# Altium PCB LDM_PCB.PcbDoc
Units mm, origin at the board's own origin, x right, y up, seen from the top; angles counter-clockwise.
Board outline 64 x 24 mm, 2 copper layers (Top Layer, Bottom Layer), stack 1.571 mm thick; 49 components, 27 nets, 118 pads, 10 vias.
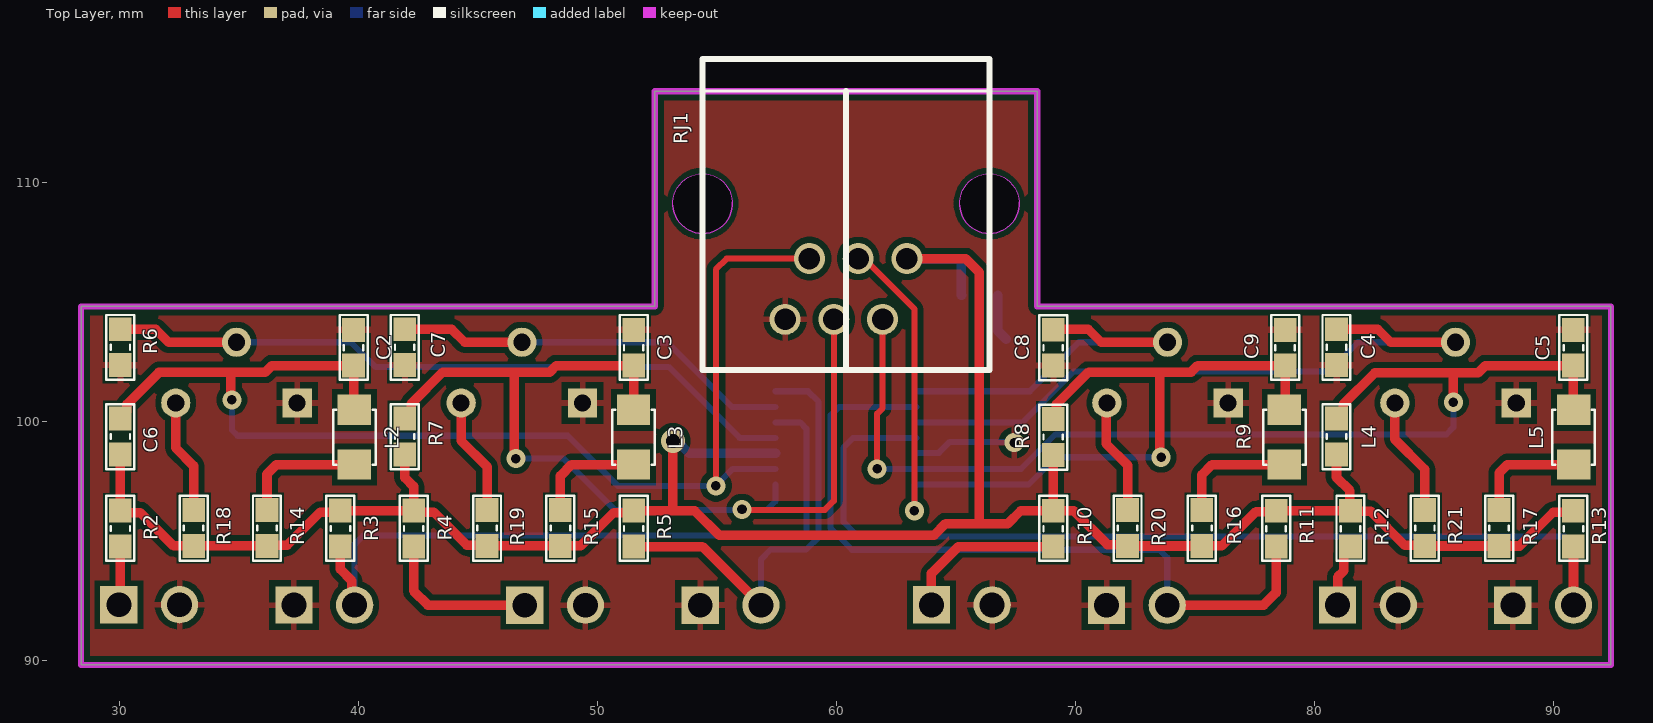
[diagram p0: Top Layer view]
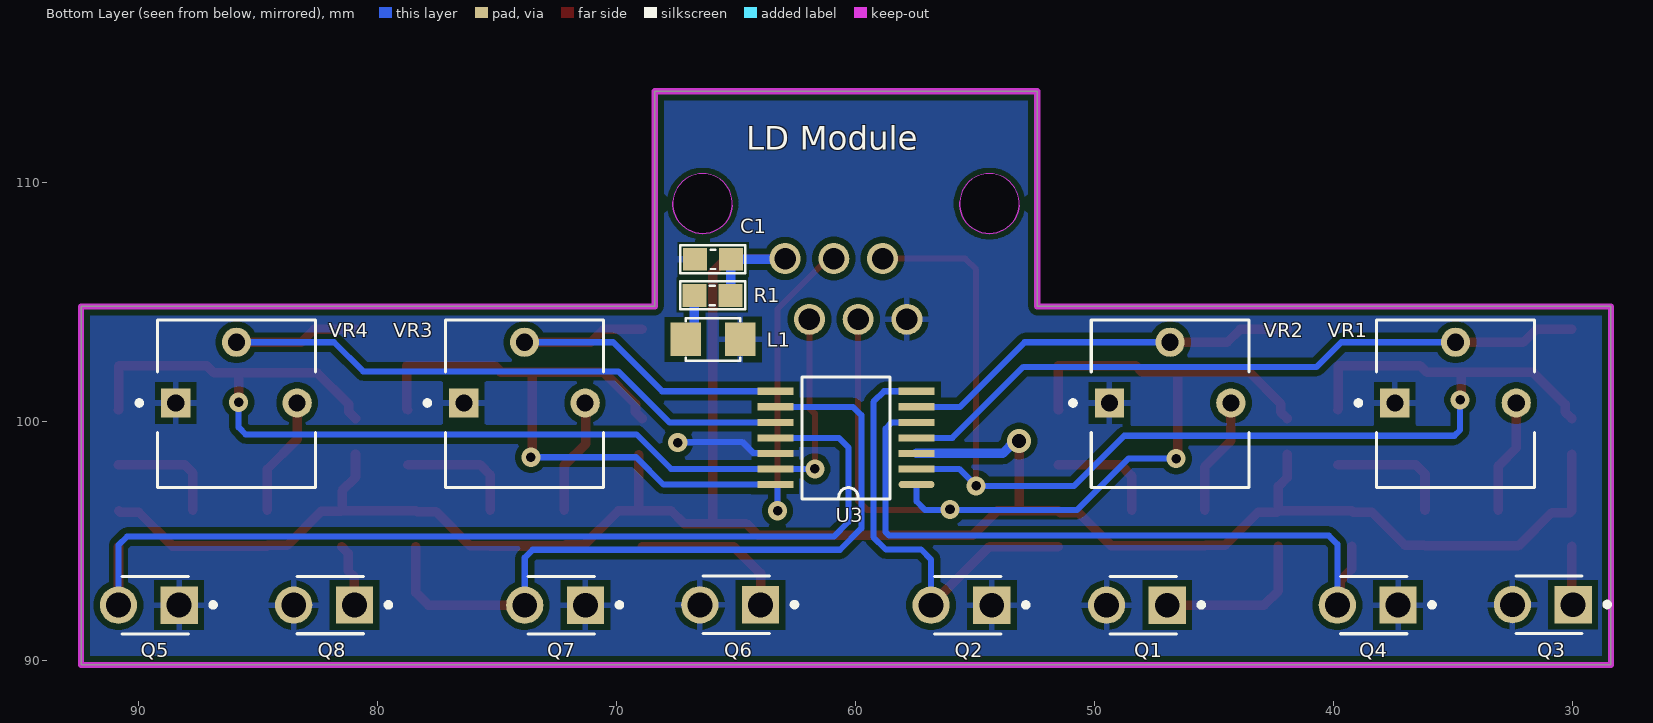
[diagram p1: Bottom Layer view, seen from below]
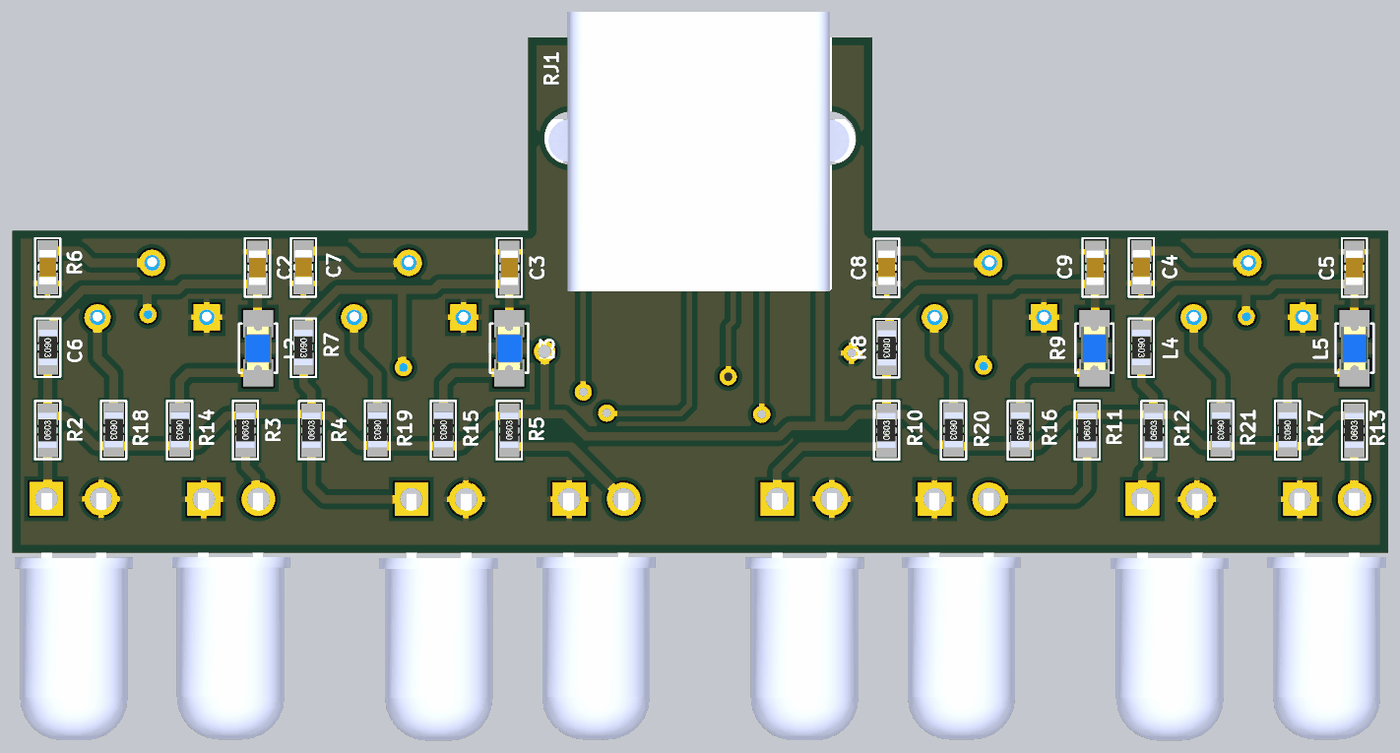
[diagram p2: 3D render of the assembled board from above, using the file's embedded part models]
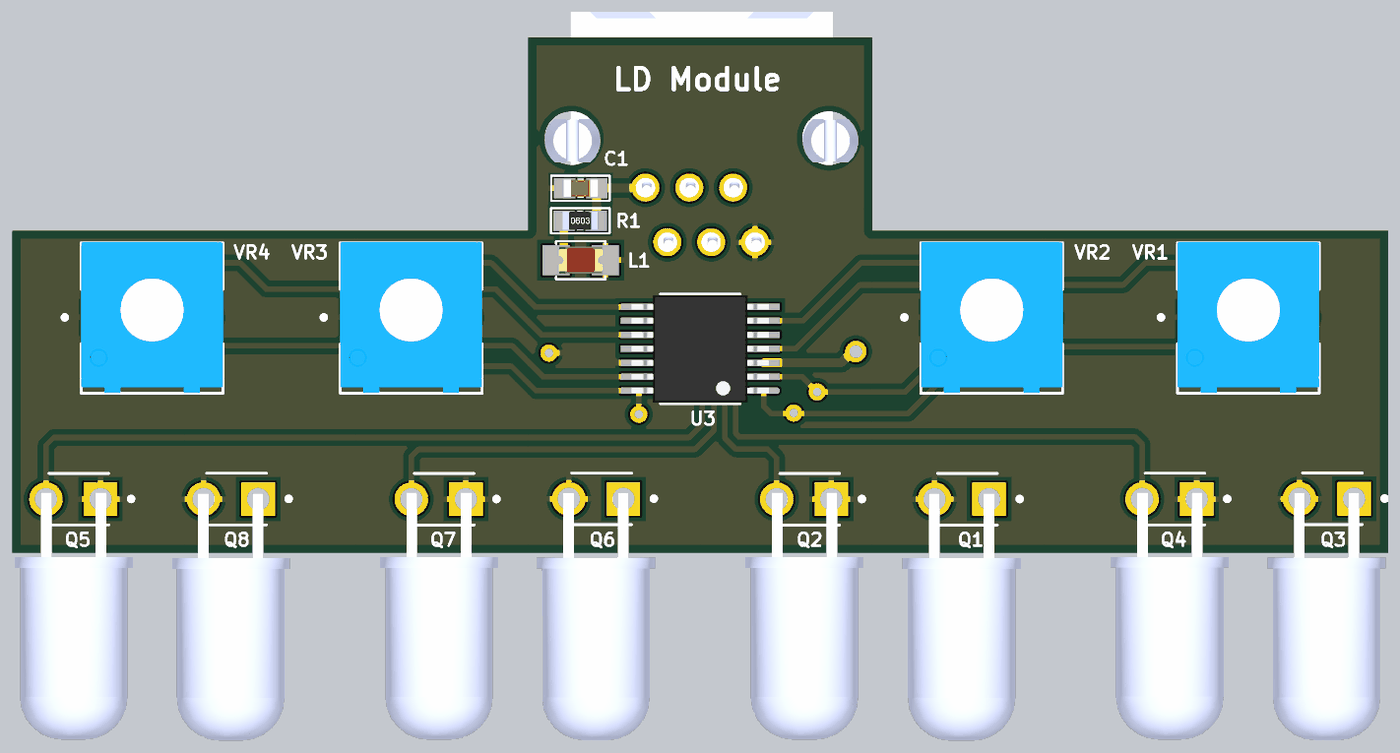
[diagram p3: 3D render of the assembled board from below, using the file's embedded part models]

## Layer stack, top to bottom
Top Solder: solder mask 0.0102, Solder Resist, Dk 3.5
Top Layer: signal copper 0.0356
Dielectric 1: dielectric 1.5, FR-4, Dk 4.8
Bottom Layer: signal copper 0.0356
Bottom Solder: solder mask 0.0102, Solder Resist, Dk 3.5

## Board outline
28.4,89.8 28.4,104.8 52.4,104.8 52.4,113.8 68.4,113.8 68.4,104.8 92.4,104.8 92.4,89.8

## Design rules (kind name [scope] priority, off if disabled: settings)
Clearance [All] p1: gap=0.254 ignorepadtopadclearanceinfootprint=FALSE except(0: Arc-Hole Track-Hole SMDPad-Hole THPad-Hole Via-Hole Fill-Hole Poly-Hole Region-Hole Text-Hole; 0.178: Arc-Text Track-Text SMDPad-Text THPad-Text Via-Text Fill-Text Poly-Text Region-Text Text-Text)
PolygonConnect [All] p1: connectstyle=Relief reliefconductorwidth=0.254 reliefentries=4 polygonreliefangle="90 Angle" airgapwidth=0.254
RoomDefinition LDM_SCH [InComponentClass('LDM_SCH')] p1: confinementstyle=ConfineIn formatcopy=TRUE lockcomponents=FALSE outline 178.943,26.924 408.813,26.924 408.813,48.133 178.943,48.133
RoutingVias [All] p1: holewidth=0.4 width=0.8 viastyle="Through Hole" minholewidth=0.3 minwidth=0.6 maxholewidth=0.5 maxwidth=1
SolderMaskExpansion [All] p1: expansion=0.102 istentingtop=FALSE
Width [All] p1: maxlimit=0.6 minlimit=0.254 preferedwidth=0.4
30 further rules are at their usual default settings.

## Components (designator, comment, footprint, x,y, rotation, side; value= is the part's Value field where it differs from the comment)
C1 "104" "tu 0603" 65.96,106.77 r0 bottom
C2 "100nF" "tu 0603" 39.8,103.07 r90 top
C3 "100nF" "tu 0603" 51.52,103.07 r90 top
C4 "100nF" "tu 0603" 78.77,103.07 r90 top
C5 "100nF" "tu 0603" 90.83,103.07 r90 top
C6 "100nF" "tu 0603" 30.04,103.095 r270 top
C7 "100nF" "tu 0603" 41.94,103.095 r270 top
C8 "100nF" "tu 0603" 69.07,103.075 r270 top
C9 "100nF" "tu 0603" 80.92,103.095 r270 top
L1 "LED 0805" LED-0805-Red 67.106,103.42 r180 bottom
L2 "LED 0805" LED-0805-Blue 39.83,98.184 r90 top
L3 "LED 0805" LED-0805-Blue 51.51,98.184 r90 top
L4 "LED 0805" LED-0805-Blue 78.74,98.184 r90 top
L5 "LED 0805" LED-0805-Blue 90.84,98.184 r90 top
Q1 "IR333-A" IR333-A 48.23,92.3 r0 bottom
Q2 "PD333-3B" PD333-3B 55.57,92.3 r0 bottom
Q3 "IR333-A" IR333-A 31.25,92.32 r0 bottom
Q4 "PD333-3B" PD333-3B 38.575,92.305 r0 bottom
Q5 "PD333-3B" PD333-3B 89.567,92.303 r0 bottom
Q6 "IR333-A" IR333-A 65.245,92.315 r0 bottom
Q7 "PD333-3B" PD333-3B 72.57,92.3 r0 bottom
Q8 "IR333-A" IR333-A 82.235,92.305 r0 bottom
R1 "1k" "tro smd 0603" 65.99,105.26 r180 bottom
R2 "330R" "tro smd 0603" 30.04,95.505 r90 top
R3 "10k" "tro smd 0603" 39.246,95.505 r90 top
R4 "330R" "tro smd 0603" 42.314,95.505 r90 top
R5 "10k" "tro smd 0603" 51.52,95.505 r90 top
R6 "10k" "tro smd 0603" 30.04,99.36 r270 top
R7 "10k" "tro smd 0603" 41.94,99.36 r270 top
R8 "10k" "tro smd 0603" 69.07,99.34 r270 top
R9 "10k" "tro smd 0603" 80.92,99.36 r270 top
R10 "330R" "tro smd 0603" 69.07,95.5 r90 top
R11 "10k" "tro smd 0603" 78.396,95.5 r90 top
R12 "330R" "tro smd 0603" 81.504,95.5 r90 top
R13 "10k" "tro smd 0603" 90.83,95.5 r90 top
R14 "1k" "tro smd 0603" 36.177,95.53 r270 top
R15 "1k" "tro smd 0603" 48.451,95.53 r270 top
R16 "1k" "tro smd 0603" 75.287,95.525 r270 top
R17 "1k" "tro smd 0603" 87.721,95.525 r270 top
R18 "1k" "tro smd 0603" 33.109,95.53 r270 top
R19 "1k" "tro smd 0603" 45.383,95.53 r270 top
R20 "1k" "tro smd 0603" 72.179,95.525 r270 top
R21 "1k" "tro smd 0603" 84.613,95.525 r270 top
RJ1 "DS1133-S60BPX" RJ11-TH_DS1133-S60BPX 60.399,105.53 r270 top
U3 "LM339DR" TSSOP14_25.6_296_15X55_SMD 60.4,99.3 r0 bottom
VR1 "10k" TRIM_3362P-1-102 34.9,100.76 r180 bottom
VR2 "10k" TRIM_3362P-1-102 46.84,100.76 r180 bottom
VR3 "10k" TRIM_3362P-1-102 73.85,100.76 r180 bottom
VR4 "10k" TRIM_3362P-1-102 85.9,100.76 r180 bottom

## Footprints (in the part's own frame and the unit in brackets; to place one, negate y for a bottom-side part, rotate by r counter-clockwise, add the part's x,y. Pads: shape width x height; smd on the part's side, far side on the other; paste and mask are expansions set on the pad)
IR333-A [mm]
  rect 1.56x1.56 hole 1.04: C(-1.27,0)
  round 1.56 hole 1.04: E(1.27,0)
  silkscreen extent -2.79,-1.2 1.13,1.2, body extent -2.74,-0.26 2.76,11.24, height 3
LED-0805-Blue [mil]
  rect 50x55 smd: 1(0,0) 2(90,0)
  silkscreen extent 0,-35 90,35, body extent 5,-25 85,25, height 43
LED-0805-Red [mil]
  rect 50x55 smd: 1(0,0) 2(90,0)
  silkscreen extent 0,-35 90,35, body extent 5,-25 85,25, height 43
PD333-3B [mm]
  rect 1.56x1.56 hole 1.04: C(-1.27,0)
  round 1.56 hole 1.04: E(1.27,0)
  silkscreen extent -2.79,-1.2 1.13,1.2, body extent -2.77,-0.31 2.73,11.19, height 3
RJ11-TH_DS1133-S60BPX [mil]
  round 51.2 hole 35.4: 1(50,-100.3) 2(-50,-60.2) 3(50,-20) 4(-50,20.1) 5(50,60.3) 6(-50,100.4)
  Keep-Out Layer board cut-out: -91.3,236.3 -91.7,230.1 -92.9,224 -94.8,218.2 -97.4,212.6 -100.7,207.3 -104.7,202.6 -109.2,198.3 -114.2,194.7 -119.6,191.7 -125.3,189.5 -131.3,187.9 -137.5,187.2 -143.6,187.2 -149.8,187.9 -155.8,189.5 -161.5,191.7 -166.9,194.7 -171.9,198.3 -176.4,202.6 -180.4,207.3 -183.7,212.6 -186.3,218.2 -188.2,224 -189.4,230.1 -189.8,236.3 -189.4,242.4 -188.2,248.5 -186.3,254.4 -183.7,260 -180.4,265.2 -176.4,270 -171.9,274.2 -166.9,277.8 -161.5,280.8 -155.8,283.1 -149.8,284.6 -143.6,285.4 -137.5,285.4 -131.3,284.6 -125.3,283.1 -119.6,280.8 -114.2,277.8 -109.2,274.2 -104.7,270 -100.7,265.2 -97.4,260 -94.8,254.4 -92.9,248.5 -91.7,242.4 -91.3,236.3
  Keep-Out Layer board cut-out: -91.3,-236.2 -91.7,-242.3 -92.9,-248.4 -94.8,-254.3 -97.4,-259.9 -100.7,-265.1 -104.7,-269.9 -109.2,-274.1 -114.2,-277.7 -119.6,-280.7 -125.3,-283 -131.3,-284.5 -137.5,-285.3 -143.6,-285.3 -149.8,-284.5 -155.8,-283 -161.5,-280.7 -166.9,-277.7 -171.9,-274.1 -176.4,-269.9 -180.4,-265.1 -183.7,-259.9 -186.3,-254.3 -188.2,-248.4 -189.4,-242.3 -189.8,-236.2 -189.4,-230 -188.2,-223.9 -186.3,-218.1 -183.7,-212.5 -180.4,-207.2 -176.4,-202.5 -171.9,-198.3 -166.9,-194.6 -161.5,-191.6 -155.8,-189.4 -149.8,-187.8 -143.6,-187.1 -137.5,-187.1 -131.3,-187.8 -125.3,-189.4 -119.6,-191.6 -114.2,-194.6 -109.2,-198.3 -104.7,-202.5 -100.7,-207.2 -97.4,-212.5 -94.8,-218.1 -92.9,-223.9 -91.7,-230 -91.3,-236.2
  Keep-Out Layer region: -91.3,236.3 -91.7,230.1 -92.9,224 -94.8,218.2 -97.4,212.6 -100.7,207.3 -104.7,202.6 -109.2,198.3 -114.2,194.7 -119.6,191.7 -125.3,189.5 -131.3,187.9 -137.5,187.2 -143.6,187.2 -149.8,187.9 -155.8,189.5 -161.5,191.7 -166.9,194.7 -171.9,198.3 -176.4,202.6 -180.4,207.3 -183.7,212.6 -186.3,218.2 -188.2,224 -189.4,230.1 -189.8,236.3 -189.4,242.4 -188.2,248.5 -186.3,254.4 -183.7,260 -180.4,265.2 -176.4,270 -171.9,274.2 -166.9,277.8 -161.5,280.8 -155.8,283.1 -149.8,284.6 -143.6,285.4 -137.5,285.4 -131.3,284.6 -125.3,283.1 -119.6,280.8 -114.2,277.8 -109.2,274.2 -104.7,270 -100.7,265.2 -97.4,260 -94.8,254.4 -92.9,248.5 -91.7,242.4 -91.3,236.3
  Keep-Out Layer region: -91.3,236.3 -91.7,230.1 -92.9,224 -94.8,218.2 -97.4,212.6 -100.7,207.3 -104.7,202.6 -109.2,198.3 -114.2,194.7 -119.6,191.7 -125.3,189.5 -131.3,187.9 -137.5,187.2 -143.6,187.2 -149.8,187.9 -155.8,189.5 -161.5,191.7 -166.9,194.7 -171.9,198.3 -176.4,202.6 -180.4,207.3 -183.7,212.6 -186.3,218.2 -188.2,224 -189.4,230.1 -189.8,236.3 -189.4,242.4 -188.2,248.5 -186.3,254.4 -183.7,260 -180.4,265.2 -176.4,270 -171.9,274.2 -166.9,277.8 -161.5,280.8 -155.8,283.1 -149.8,284.6 -143.6,285.4 -137.5,285.4 -131.3,284.6 -125.3,283.1 -119.6,280.8 -114.2,277.8 -109.2,274.2 -104.7,270 -100.7,265.2 -97.4,260 -94.8,254.4 -92.9,248.5 -91.7,242.4 -91.3,236.3
  Keep-Out Layer region: -91.3,-236.2 -91.7,-242.3 -92.9,-248.4 -94.8,-254.3 -97.4,-259.9 -100.7,-265.1 -104.7,-269.9 -109.2,-274.1 -114.2,-277.7 -119.6,-280.7 -125.3,-283 -131.3,-284.5 -137.5,-285.3 -143.6,-285.3 -149.8,-284.5 -155.8,-283 -161.5,-280.7 -166.9,-277.7 -171.9,-274.1 -176.4,-269.9 -180.4,-265.1 -183.7,-259.9 -186.3,-254.3 -188.2,-248.4 -189.4,-242.3 -189.8,-236.2 -189.4,-230 -188.2,-223.9 -186.3,-218.1 -183.7,-212.5 -180.4,-207.2 -176.4,-202.5 -171.9,-198.3 -166.9,-194.6 -161.5,-191.6 -155.8,-189.4 -149.8,-187.8 -143.6,-187.1 -137.5,-187.1 -131.3,-187.8 -125.3,-189.4 -119.6,-191.6 -114.2,-194.6 -109.2,-198.3 -104.7,-202.5 -100.7,-207.2 -97.4,-212.5 -94.8,-218.1 -92.9,-223.9 -91.7,-230 -91.3,-236.2
  Keep-Out Layer region: -91.3,-236.2 -91.7,-242.3 -92.9,-248.4 -94.8,-254.3 -97.4,-259.9 -100.7,-265.1 -104.7,-269.9 -109.2,-274.1 -114.2,-277.7 -119.6,-280.7 -125.3,-283 -131.3,-284.5 -137.5,-285.3 -143.6,-285.3 -149.8,-284.5 -155.8,-283 -161.5,-280.7 -166.9,-277.7 -171.9,-274.1 -176.4,-269.9 -180.4,-265.1 -183.7,-259.9 -186.3,-254.3 -188.2,-248.4 -189.4,-242.3 -189.8,-236.2 -189.4,-230 -188.2,-223.9 -186.3,-218.1 -183.7,-212.5 -180.4,-207.2 -176.4,-202.5 -171.9,-198.3 -166.9,-194.6 -161.5,-191.6 -155.8,-189.4 -149.8,-187.8 -143.6,-187.1 -137.5,-187.1 -131.3,-187.8 -125.3,-189.4 -119.6,-191.6 -114.2,-194.6 -109.2,-198.3 -104.7,-202.5 -100.7,-207.2 -97.4,-212.5 -94.8,-218.1 -92.9,-223.9 -91.7,-230 -91.3,-236.2
  Keep-Out Layer lines w0.1: -137.5,-285.3 -131.3,-284.5 -125.3,-283 -119.6,-280.7 -114.2,-277.7 -109.2,-274.1 -104.7,-269.9 -100.7,-265.1 -97.4,-259.9 -94.8,-254.3 -92.9,-248.4 -91.7,-242.3 -91.3,-236.2 -91.7,-230 -92.9,-223.9 -94.8,-218.1 -97.4,-212.5 -100.7,-207.2 -104.7,-202.5 -109.2,-198.3 -114.2,-194.6 -119.6,-191.6 -125.3,-189.4 -131.3,-187.8 -137.5,-187.1 -143.6,-187.1 -149.8,-187.8 -155.8,-189.4 -161.5,-191.6 -166.9,-194.6 -171.9,-198.3 -176.4,-202.5 -180.4,-207.2 -183.7,-212.5 -186.3,-218.1 -188.2,-223.9 -189.4,-230 -189.8,-236.2 -189.4,-242.3 -188.2,-248.4 -186.3,-254.3 -183.7,-259.9 -180.4,-265.1 -176.4,-269.9 -171.9,-274.1 -166.9,-277.7 -161.5,-280.7 -155.8,-283 -149.8,-284.5 -143.6,-285.3 -137.5,-285.3 ; -137.5,187.2 -131.3,187.9 -125.3,189.5 -119.6,191.7 -114.2,194.7 -109.2,198.3 -104.7,202.6 -100.7,207.3 -97.4,212.6 -94.8,218.2 -92.9,224 -91.7,230.1 -91.3,236.3 -91.7,242.4 -92.9,248.5 -94.8,254.4 -97.4,260 -100.7,265.2 -104.7,270 -109.2,274.2 -114.2,277.8 -119.6,280.8 -125.3,283.1 -131.3,284.6 -137.5,285.4 -143.6,285.4 -149.8,284.6 -155.8,283.1 -161.5,280.8 -166.9,277.8 -171.9,274.2 -176.4,270 -180.4,265.2 -183.7,260 -186.3,254.4 -188.2,248.5 -189.4,242.4 -189.8,236.3 -189.4,230.1 -188.2,224 -186.3,218.2 -183.7,212.6 -180.4,207.3 -176.4,202.6 -171.9,198.3 -166.9,194.7 -161.5,191.7 -155.8,189.5 -149.8,187.9 -143.6,187.2 -137.5,187.2
  silkscreen extent -379,-236 133,236, body extent -372,-289 140,285, height 575
TRIM_3362P-1-102 [mm]
  rect 1.222x1.222 / inner round 1.222 / far side rect 1.222x1.222 hole 0.714: 1(-2.54,0)
  round 1.222 hole 0.714: 2(0,2.54) 3(2.54,0)
  silkscreen extent -4.16,-3.53 3.3,3.47, body extent -3.3,-3.49 3.3,3.49, height 4.88
"tro smd 0603" [mm] "Chip Capacitor, 2-Leads, Body 1,60x0,80mm, IPC Medium Density"
  rect 1x0.95 smd mask+0.076: 1(-0.75,0) 2(0.75,0)
  silkscreen extent -1.35,-0.58 1.37,0.58, body extent -0.82,-0.42 0.82,0.43, height 0.44
TSSOP14_25.6_296_15X55_SMD [mm] "CASE: TSSOP"
  oval 1.5x0.3 smd: 1(-2.95,1.95)
  rect 1.5x0.3 smd: 2(-2.95,1.3) 3(-2.95,0.65) 4(-2.95,0) 5(-2.95,-0.65) 6(-2.95,-1.3) 7(-2.95,-1.95) 8(2.95,-1.95) 9(2.95,-1.3) 10(2.95,-0.65) 11(2.95,0) 12(2.95,0.65) 13(2.95,1.3) 14(2.95,1.95)
  silkscreen extent -1.85,-2.55 1.85,2.55, body extent -3.2,-2.5 3.2,2.5, height 1.2
"tu 0603" [mm] "Chip Capacitor, 2-Leads, Body 1,60x0,80mm, IPC Medium Density"
  rect 1x0.95 smd mask+0.076: 1(-0.75,0) 2(0.75,0)
  silkscreen extent -1.35,-0.58 1.37,0.58, body extent -0.8,-0.4 0.8,0.4, height 0.9

## Part data
C1 C2 C3 C4 C5 C6 C7 C8 C9: library part "Tu 0603 104 50V 10%", "Dán", Chung_Loai=Dán, Don_Vi=Con, Ma_Hang=MH004568, So_Chan=2, Ten_Linh_Kien="Tụ 0603 104-100nF 10% 50V"
L1: library part "LED 0805 Do", "Dán", Chung_Loai=Dán, Don_Vi=Con, Ma_Hang=MH000897, Ten_Linh_Kien="LED 0805 Màu Đỏ (Red)"
L2 L3 L4 L5: library part "LED 0805 Xanh Duong", "Dán", Chung_Loai=Dán, Don_Vi=Con, Ma_Hang=MH002327, Ten_Linh_Kien="LED 0805 Màu Xanh Dương (Blue)"
Q1 Q2 Q3 Q4 Q5 Q6 Q7 Q8: Package=None, Availability=Unavailable, MP=BPW16N, Price=None
R1 R6 R7 R8 R9 R14 R15 R16 R17: library part "Tro 0603 1% 1k", "Dán", Chung_Loai=Dán, Don_Vi=Con, Ma_Hang=MH006334, So_Chan=2, Ten_Linh_Kien="Trở 0603 1% 1k"
R2 R4 R10 R12: library part "Tro 0603 5% 330R", "Dán", Chung_Loai=Dán, Don_Vi=Con, Ma_Hang=MH006910, So_Chan=2, Ten_Linh_Kien="Trở 0603 5% 330R"
R3 R5 R11 R13 R18 R19 R20 R21: library part "Tro 0603 1% 10k", "Dán", Chung_Loai=Dán, Don_Vi=Con, Ma_Hang=MH006333, So_Chan=2, Ten_Linh_Kien="Trở 0603 1% 10k"
RJ1: "Connector Type:RJ12 Jack Mounting Type:Right Angle Number of Ports:1 LED:Non-LED Shielding:Unshielded Ratings:- PoE:Non-PoE Supplementary Features:Harpoon Contact (Plastic) Contact Material:Copper alloy Contact Plating:Gold Operating Temperature:-40℃~+85℃", JLCPCB Part Class="Extended Part", LCSC Part Name="弯插 不带LED", Manufacturer=CONNFLY, Operating Temperature=-40℃~+85℃, Ratings=-, AddInBom=yes, Connector Type="RJ12 Jack", Contact Material="Copper alloy", Contact Plating=Gold, ConvertToPcb=yes, Datasheet=https://item.szlcsc.com/datasheet/DS1133-S60BPX/78993.html, Device=DS1133-S60BPX, FootprintName=RJ11-TH_DS1133-S60BPX, LED=Non-LED, ManufacturerPart=DS1133-S60BPX, ModelId=233decdc871549d2a39df488d254df7dÂŽ0819f05c4eef4c71ace90d822a990e87, ModelName=RJ11-TH_DS1133-S60BPX, ModelTransform=511.81,574.316,0,0,0,0,-120.079,0.551,-125.984, Mounting Type="Right Angle", Number of Ports=1, PoE=Non-PoE, Shielding=Unshielded, Supplementary Features="Harpoon Contact (Plastic)", Supplier=LCSC, Supplier Footprint=插件, SupplierPart=C77859, Symbol=DS1133-S60BPX
U3: library part IC_LM339DR, "Comparator Differential CMOS, MOS, Open-Collector, TTL 14-SOIC", Alternate Part Number-1=LM339NSR, Case/Package=TSSOP14, Manufacturer="TI National Semiconductor", Supplier Part Number-1=C7948, Manufacturer Part Number=LM339DR, Supplier-1=LCSC
VR1 VR2 VR3 VR4: library part "Bien tro vuong", "TRIMMER - 1/4in SQ ST CERMET", Package="3362P-1 Bourns Inc.", Check_prices=https://www.snapeda.com/parts/3362P-1-102/Bourns/view-part/?ref=eda, MF=Bourns, MP=3362P-1-102, SnapEDA_Link=https://www.snapeda.com/parts/3362P-1-102/Bourns/view-part/?ref=snap

## Via types
v1: diameter 0.8, hole 0.4, Top Layer to Bottom Layer, 9 vias
v2: diameter 1, hole 0.6, Top Layer to Bottom Layer, 1 vias

## Nets (pads, with @x,y where several pads share a name; then routed paths per layer and width w, separated by ;. In a path a pad name is that pad's centre, name@x,y a point inside that pad or via, vN(x,y) a via of type N, cw(c..) or ccw(c..) an arc to the next point about the centre after c; other vN are vias at no path point)
+5: C1.1 R1.2 R2.2 R3.2 R4.2 R5.2 R6.2 R7.2 R8.2 R9.2 R10.2 R11.2 R12.2 R13.2 R14.2 R15.2 R16.2 R17.2 R18.2 R19.2 R20.2 R21.2 RJ1.6 U3.3 | length 101.3
  Top Layer w0.4: R6.2 R2.2 30.125,96.169 30.881,96.169 32.268,94.782 33.106,94.782 R18.2 R14.2 36.205,94.808 37.018,94.808 38.405,96.195 39.186,96.195 R3.2 R4.2 ; R7.2 41.94,97.64 42.314,97.266 R4.2 ; v2(53.16,99.17) 53.16,96.252 ; RJ1.6 65.4,106.8 65.98,106.22 65.98,95.71 ; R8.2 R10.2 ; R9.2 80.92,97.65 81.48,97.09 81.48,96.274 R12.2 ; R13.2 90.769,96.189 89.989,96.189 88.575,94.775 R17.2 R21.2 84.58,94.808 83.772,94.808 82.345,96.235 81.519,96.235 R12.2 ; R4.2 42.374,96.195 43.155,96.195 44.542,94.808 45.355,94.808 R19.2 R15.2 48.454,94.782 49.292,94.782 50.679,96.169 51.435,96.169 R5.2 51.522,96.252 53.16,96.252 ; 53.16,96.252 54.07,96.252 55.092,95.23 64.09,95.23 64.57,95.71 65.98,95.71 ; 65.98,95.71 67.17,95.71 67.71,96.25 R10.2 ; R10.2 69.92,96.25 71.338,94.832 72.122,94.832 R20.2 R16.2 75.3,94.788 76.128,94.788 77.555,96.215 78.361,96.215 R11.2 R12.2
  Bottom Layer w0.4: v2(53.16,99.17) 53.322,99.17 53.842,98.65 U3.3 ; RJ1.6 62.969,106.78 65.21,106.78 65.225,106.765 65.225,105.275 R1.2
GND: C1.2 C2.2 C3.2 C4.2 C5.2 C6.2 C7.2 C8.2 C9.2 L1.2 Q1.E Q2.C Q3.E Q4.C Q5.C Q6.E Q7.C Q8.E RJ1.1 U3.12 VR1.1 VR2.1 VR3.1 VR4.1 | length 4.3
  Bottom Layer w0.254: U3.12 63.373,98.673 64.285,98.673 64.742,99.13 67.41,99.13 v1(67.44,99.1)
IN1+: Q4.E R3.1 U3.5 | length 30.1
  Top Layer w0.4: R3.1 39.246,93.804 39.719,93.331 39.719,92.431 Q4.E
  Bottom Layer w0.254: Q4.E 39.845,94.855 40.2,95.21 58.595,95.21 58.744,95.359 58.744,99.686 58.48,99.95 U3.5
IN1-: C6.1 U3.4 VR1.2 | length 29.3
  Top Layer w0.4: C6.1 31.515,103.845 32.06,103.3 VR1.2
  Bottom Layer w0.254: VR1.2 39.681,103.3 40.711,102.27 52.98,102.27 55.95,99.3 U3.4
IN2+: Q2.E R5.1 U3.7 | length 18.7
  Top Layer w0.4: R5.1@51.52,94.75 54.39,94.75 Q2.E
  Bottom Layer w0.254: Q2.E 56.84,94.21 57.26,94.63 58.734,94.63 59.252,95.148 59.252,100.804 58.806,101.25 U3.7
IN2-: C7.1 U3.6 VR2.2 | length 16.9
  Top Layer w0.4: C7.1 43.905,103.845 44.45,103.3 VR2.2
  Bottom Layer w0.254: VR2.2 51.92,103.3 52.929,103.3 55.629,100.6 U3.6
IN3+: Q7.E R11.1 U3.9 | length 31.7
  Top Layer w0.4: Q7.E 77.87,92.3 78.396,92.826 R11.1
  Bottom Layer w0.254: U3.9 60.11,100.6 59.76,100.25 59.76,95.51 60.65,94.62 73.51,94.62 73.84,94.29 Q7.E
IN3-: C8.1 U3.8 VR3.2 | length 16.5
  Top Layer w0.4: C8.1@68.93,103.845 70.535,103.845 71.08,103.3 VR3.2
  Bottom Layer w0.254: U3.8 68.09,101.25 70.14,103.3 VR3.2
IN4+: Q5.E R13.1 U3.11 | length 42.2
  Top Layer w0.4: R13.1 90.834,94.746 90.834,92.306 Q5.E
  Bottom Layer w0.254: U3.11 60.7,99.3 60.3,98.9 60.3,95.78 60.91,95.17 90.48,95.17 90.837,94.813 Q5.E
IN4-: C9.1 U3.10 VR4.2 | length 29.1
  Top Layer w0.4: C9.1 82.645,103.845 83.19,103.3 VR4.2
  Bottom Layer w0.254: U3.10 67.79,99.95 69.92,102.08 80.6,102.08 81.82,103.3 VR4.2
NetL1_1: L1.1 R1.1 | length 2
  Bottom Layer w0.4: R1.1 66.74,103.786 L1.1
NetL2_1: L2.1 R14.1 | length 5.3
  Top Layer w0.4: R14.1 36.177,97.787 36.574,98.184 L2.1
NetL3_1: L3.1 R15.1 | length 4.7
  Top Layer w0.4: R15.1 48.451,97.711 48.924,98.184 L3.1
NetL4_1: L4.1 R16.1 | length 5.1
  Top Layer w0.4: R16.1 75.29,96.278 75.287,96.281 75.287,97.757 75.714,98.184 L4.1
NetL5_1: L5.1 R17.1 | length 4.8
  Top Layer w0.4: R17.1 87.721,97.831 88.074,98.184 L5.1
NetQ1_C: Q1.C R4.1 | length 6.8
  Top Layer w0.4: R4.1 42.314,92.896 42.91,92.3 Q1.C
NetQ3_C: Q3.C R2.1 | length 2.5
  Top Layer w0.4: Q3.C 30.04,92.38 R2.1
NetQ6_C: Q6.C R10.1 | length 6.7
  Top Layer w0.4: Q6.C 63.975,93.625 65.1,94.75 R10.1@68.93,94.75
NetQ8_C: Q8.C R12.1 | length 2.7
  Top Layer w0.4: Q8.C@80.91,92.36 Q8.C 80.965,93.475 81.229,93.739 81.229,94.475 R12.1
NetR18_1: R18.1 VR1.3 | length 4.8
  Top Layer w0.4: VR1.3 32.36,98.88 33.109,98.131 R18.1
NetR19_1: R19.1 VR2.3 | length 4.9
  Top Layer w0.4: VR2.3 44.3,99.18 45.383,98.097 R19.1
NetR20_1: R20.1 VR3.3 | length 4.9
  Top Layer w0.4: VR3.3 71.285,100.735 71.285,99.055 72.179,98.161 R20.1
NetR21_1: R21.1 VR4.3 | length 5
  Top Layer w0.4: VR4.3 83.36,99.24 84.613,97.987 R21.1
OUT1: C2.1 L2.2 R6.1 RJ1.2 U3.2 | length 52.3
  Top Layer w0.254: v1(54.96,97.29) 54.96,106.35 55.41,106.8 RJ1.2
  Top Layer w0.4: R6.1 30.315,100.385 30.315,100.695 31.66,102.04 34.67,102.04 ; v1(34.71,100.89) 34.67,100.93 34.67,102.04 ; L2.2 39.8,100.5 C2.1 36.38,102.32 36.1,102.04 34.67,102.04
  Bottom Layer w0.254: v1(34.71,100.89) 34.71,99.63 34.95,99.39 48.76,99.39 50.86,97.29 v1(54.96,97.29) 55.67,98 U3.2
OUT2: C3.1 L3.2 R7.1 RJ1.3 U3.1 | length 40.4
  Top Layer w0.254: v1(56.05,96.31) 56.07,96.29 59.51,96.29 59.891,96.671 RJ1.3
  Top Layer w0.4: R7.1 42.215,100.385 42.215,100.735 43.53,102.05 46.523,102.05 ; v1(46.59,98.43) 46.523,98.497 46.523,102.05 ; L3.2 51.52,100.48 C3.1 48.28,102.32 48.01,102.05 46.523,102.05
  Bottom Layer w0.254: v1(46.59,98.43) 48.59,98.43 50.73,96.29 56.03,96.29 v1(56.05,96.31) 56.07,96.29 57.1,96.29 57.45,96.64 U3.1
OUT3: C4.1 L4.2 R8.1 RJ1.4 U3.14 | length 39.9
  Top Layer w0.254: RJ1.4 61.16,106.8 63.26,104.7 v1(63.26,96.25)
  Top Layer w0.4: R8.1@68.93,100.11 69.205,100.385 69.205,100.705 70.55,102.05 73.53,102.05 ; v1(73.58,98.49) 73.53,98.54 73.53,102.05 ; L4.2 78.77,100.5 C4.1 75.11,102.32 74.84,102.05 73.53,102.05
  Bottom Layer w0.254: v1(63.26,96.25) 63.26,97.327 63.283,97.35 66.17,97.35 68.04,97.35 69.18,98.49 v1(73.58,98.49)
OUT4: C5.1 L5.2 R9.1 RJ1.5 U3.13 | length 46.3
  Top Layer w0.254: v1(61.7,98) 61.7,100.317 61.931,100.548 RJ1.5
  Top Layer w0.4: R9.1 81.195,100.385 81.195,100.695 82.52,102.02 85.8,102.02 ; v1(85.81,100.79) 85.8,100.8 85.8,102.02 ; L5.2 90.83,100.48 C5.1 87.147,102.32 86.847,102.02 85.8,102.02
  Bottom Layer w0.254: v1(61.7,98) 67.72,98 69.16,99.44 85.51,99.44 85.81,99.74 v1(85.81,100.79)

## Polygon pours and split planes (outlines as drawn)
GND on Top Layer "GND_L01_P001" (solid, pour order 1): 52.4,113.8 52.4,104.8 28.399,104.799 28.399,89.801 92.4,89.8 92.4,104.8 68.4,104.8 68.4,113.8
GND on Bottom Layer "GND_L02_P000" (solid, pour order 0): 52.4,113.8 68.4,113.8 68.4,104.8 92.4,104.8 92.4,89.8 28.4,89.8 28.4,104.8 52.4,104.8

## Keep-outs
Keep-Out Layer:
  lines w0.254: 28.4,89.8 92.4,89.8 92.4,104.8 68.4,104.8 68.4,113.8 60.4,113.8 52.4,113.8 52.4,104.8 28.4,104.8 28.4,89.8

## Silkscreen, mask and mechanical layers (free items; w line width, h text height)
Bottom Overlay:
  text "LD Module" at 64.57,111.36 h1